# Altium PCB UU121_WiFi.PcbDoc
Units mm, origin at the board's own origin, x right, y up, seen from the top; angles counter-clockwise.
Board outline 30 x 50.86 mm, 4 copper layers (Top Layer, PWR, GND, Bottom Layer), stack 1.449 mm thick; 28 components, 15 nets, 153 pads, 33 vias.
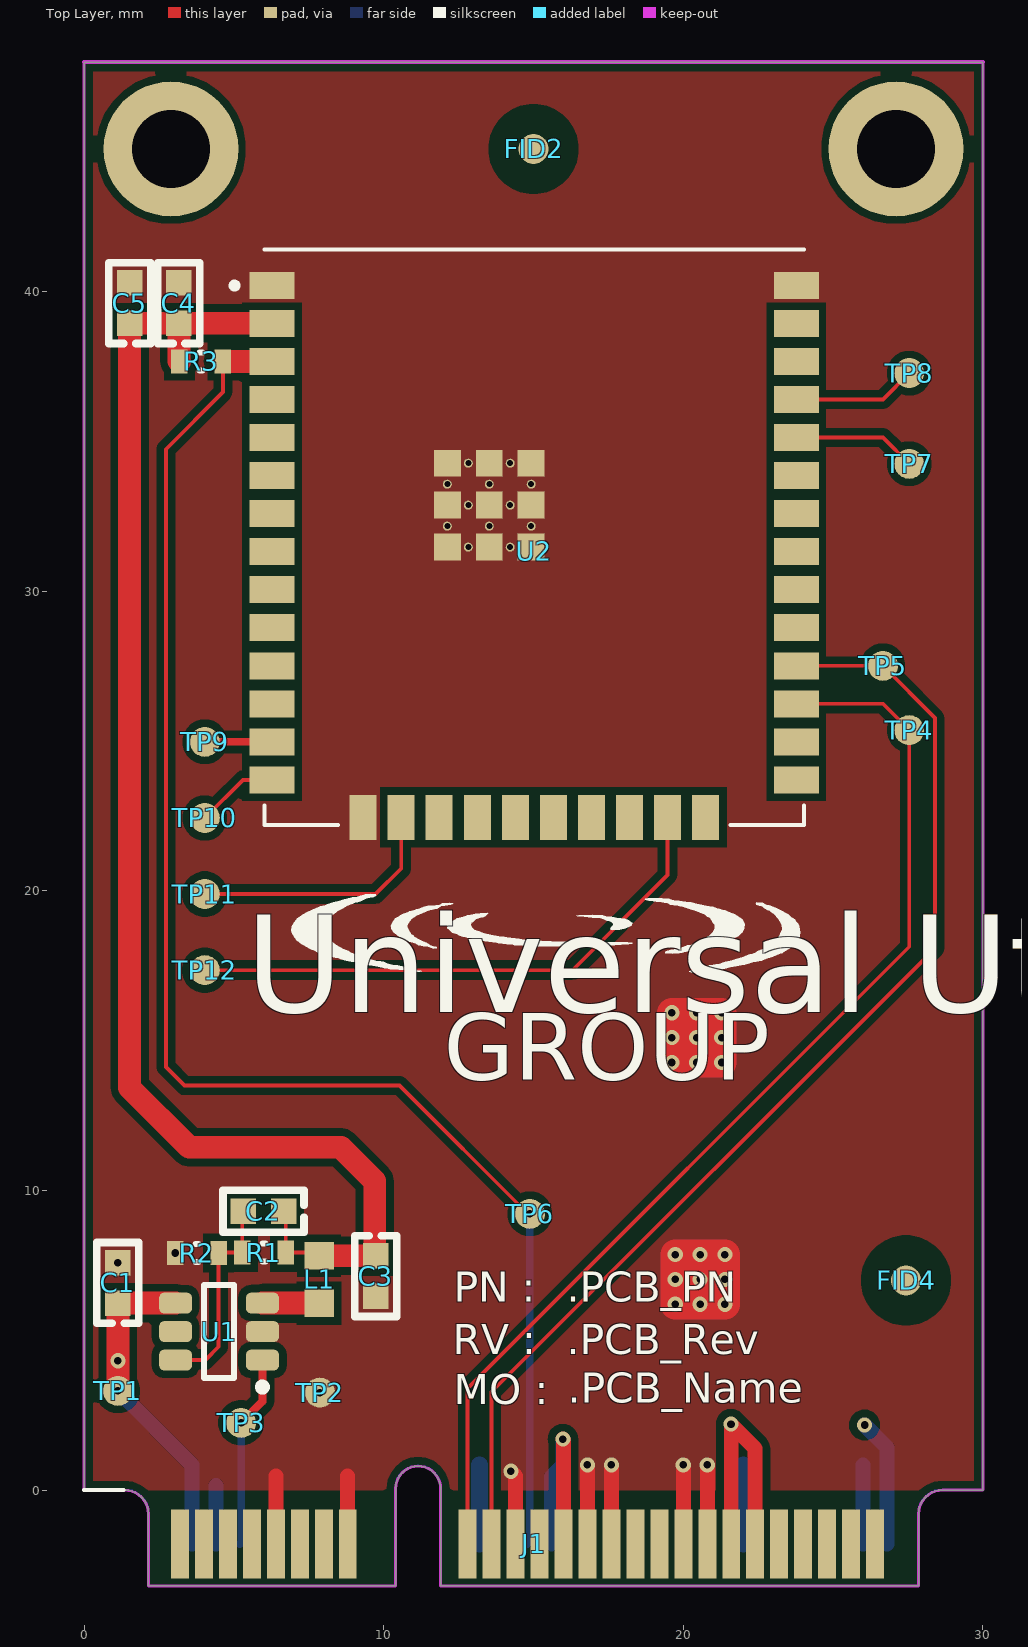
[diagram p0: Top Layer view]
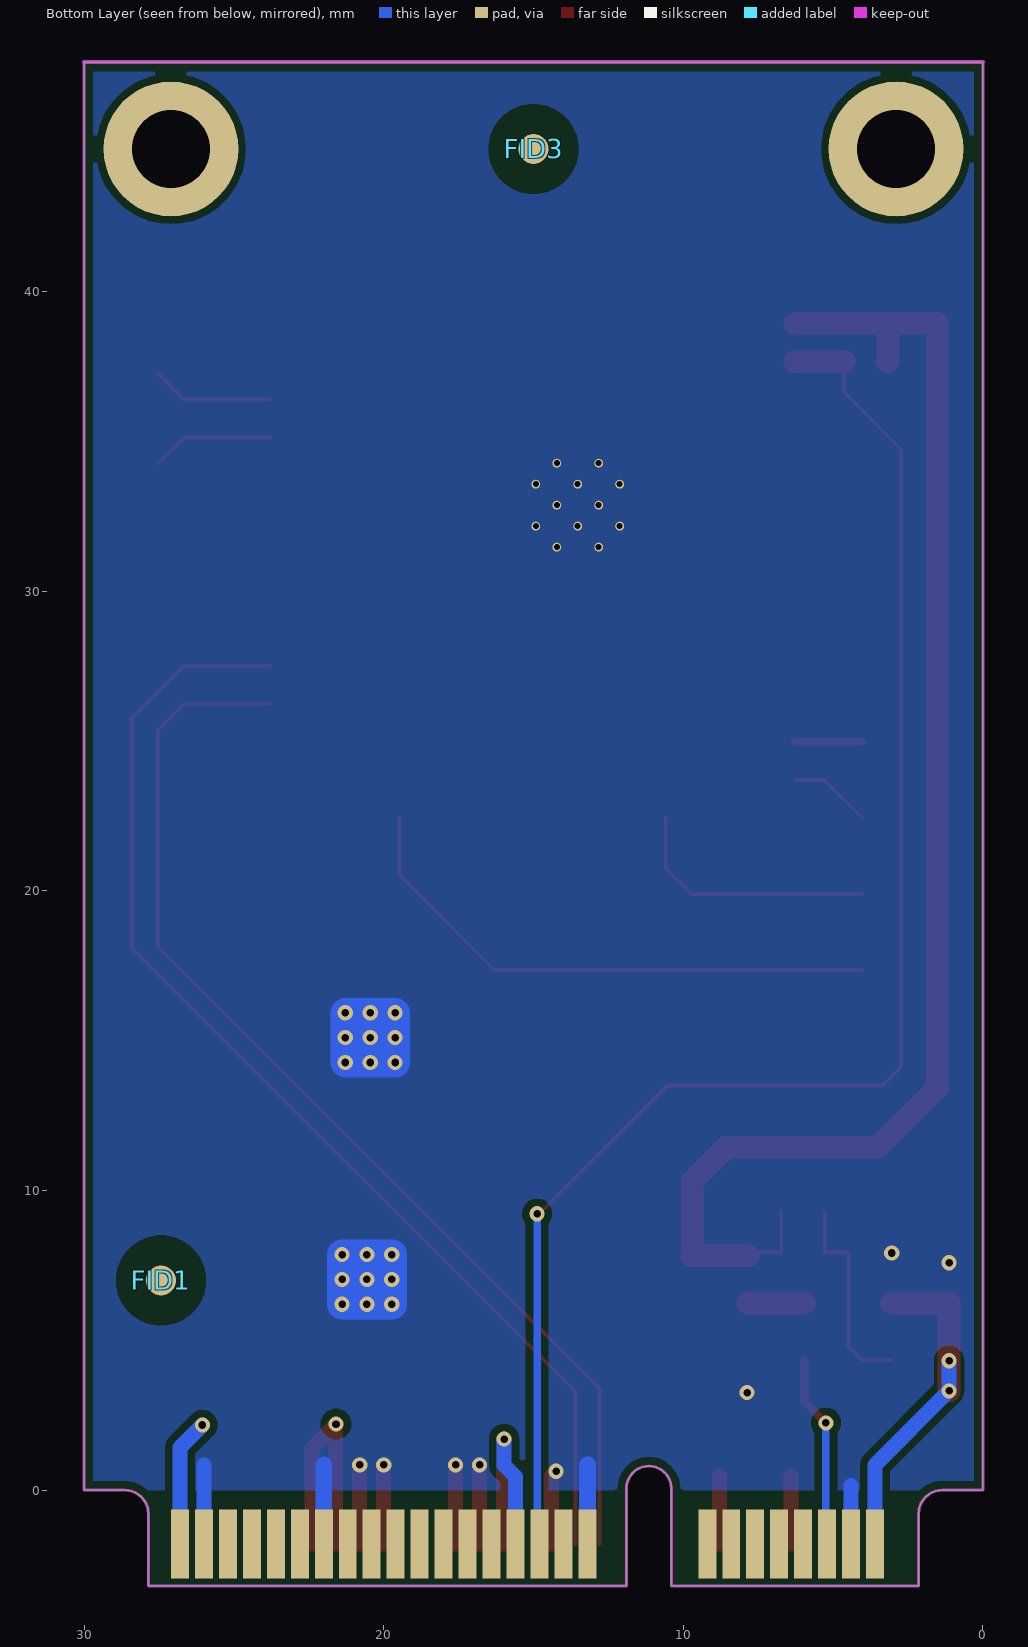
[diagram p1: Bottom Layer view, seen from below]
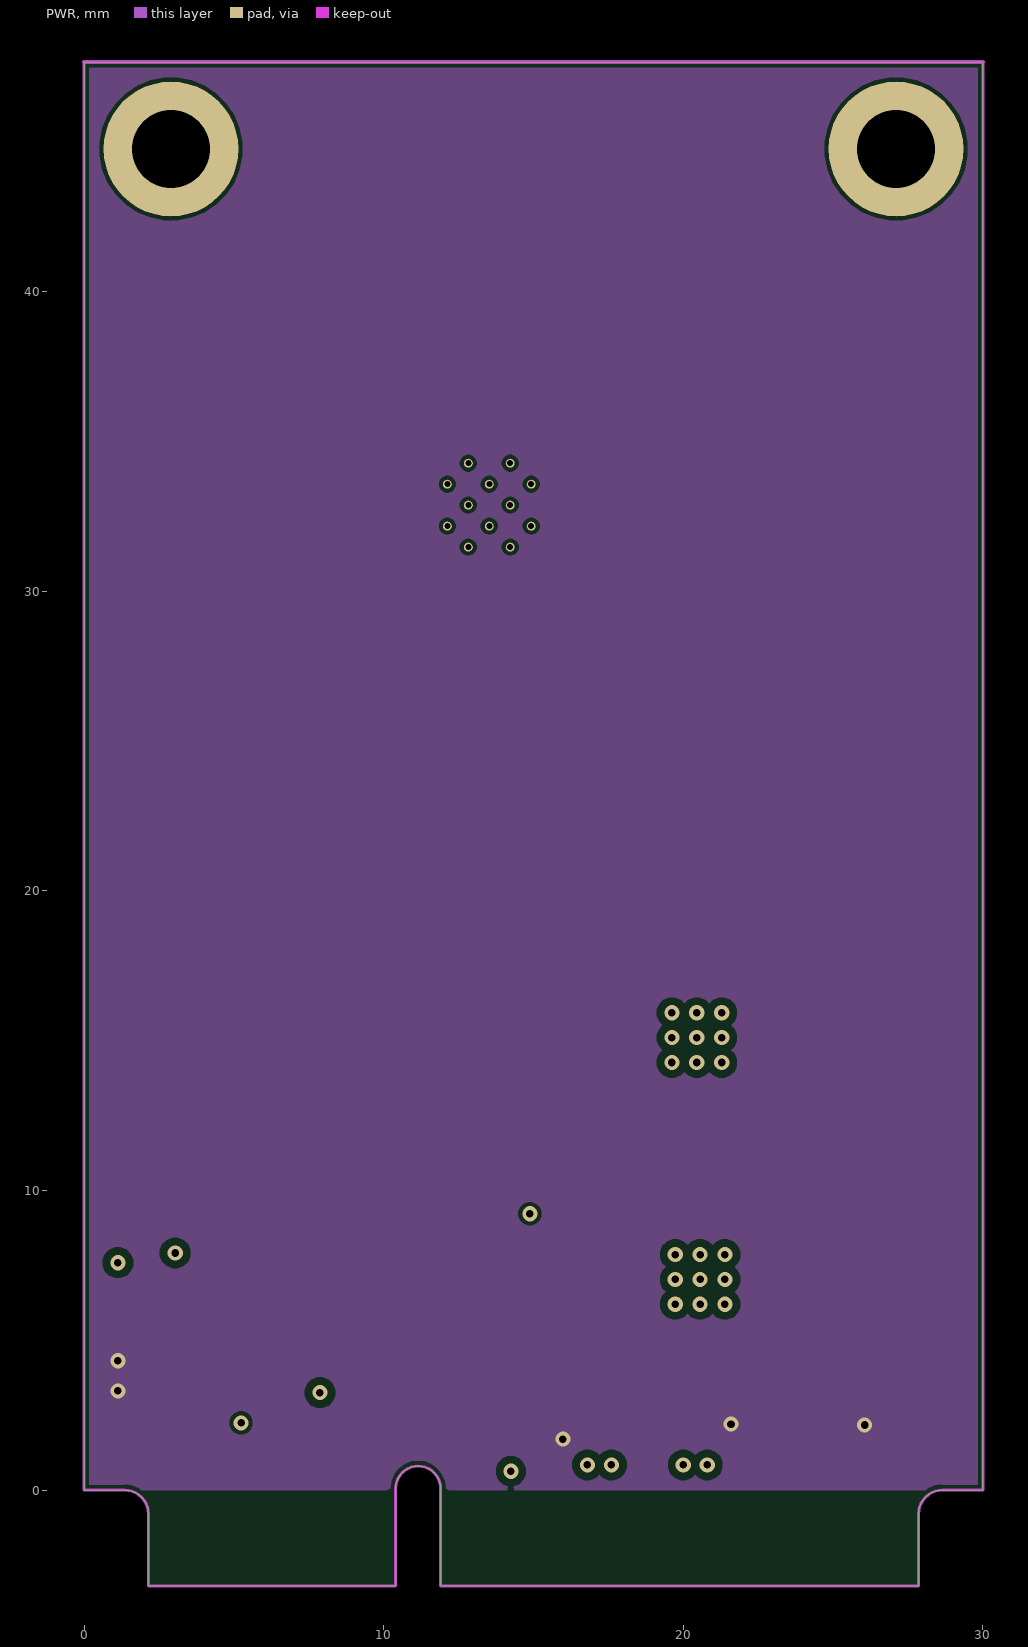
[diagram p2: PWR]
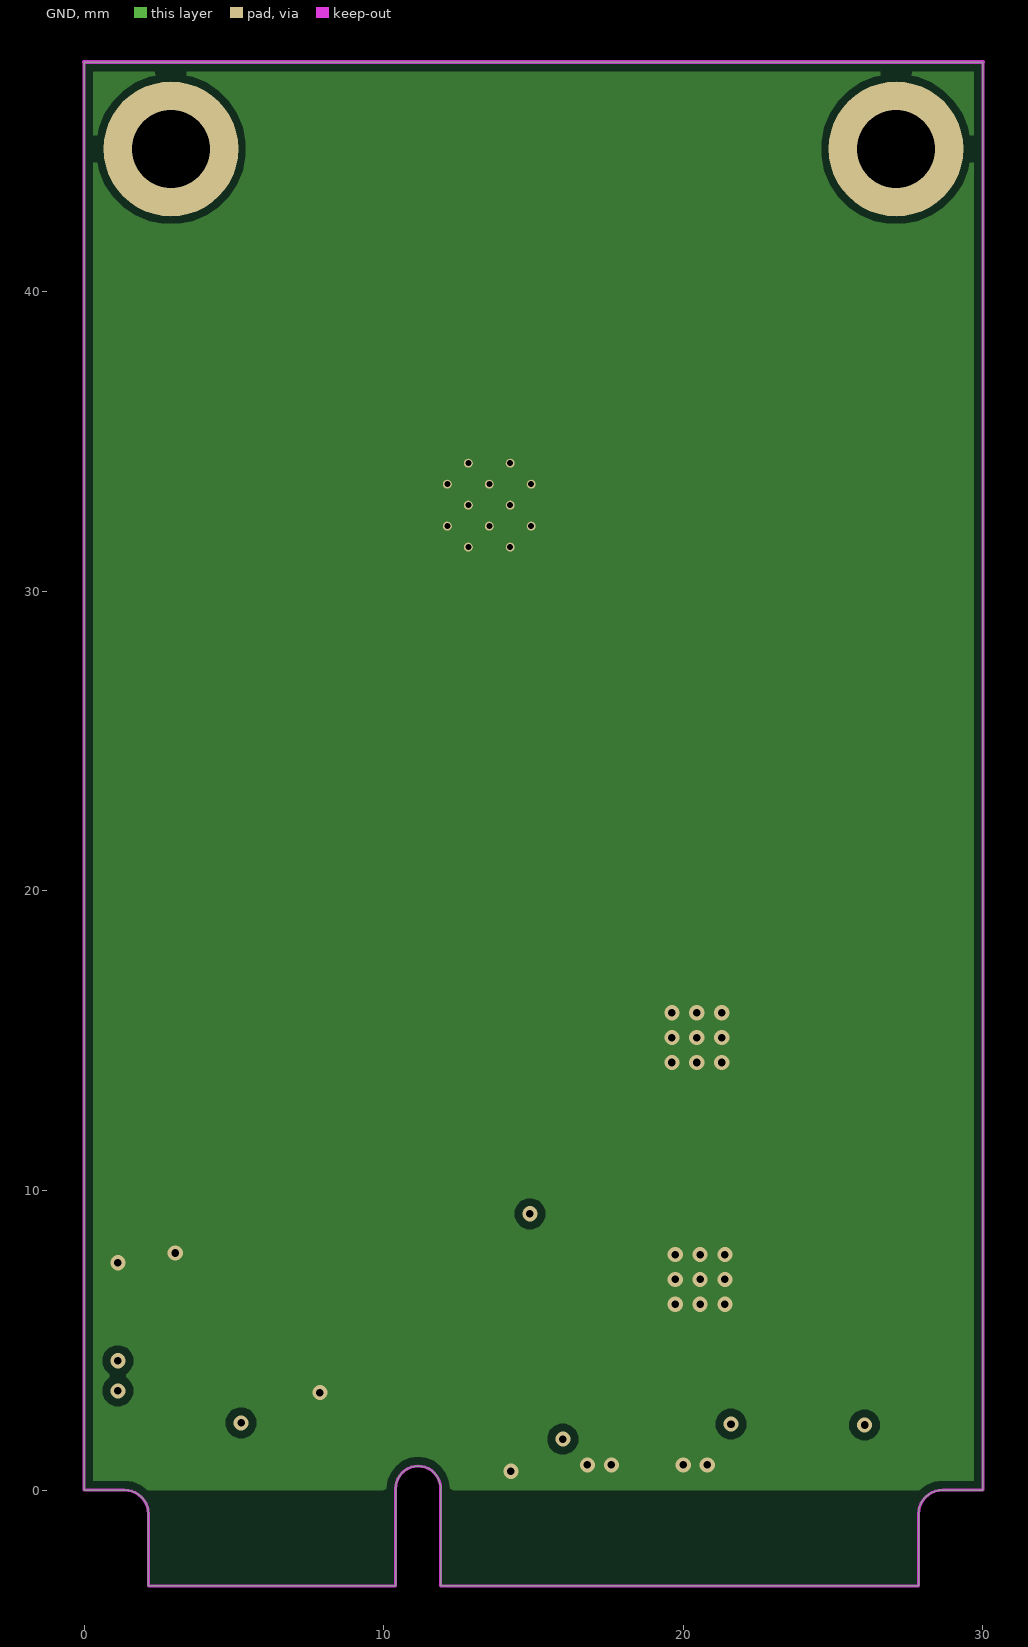
[diagram p3: GND]
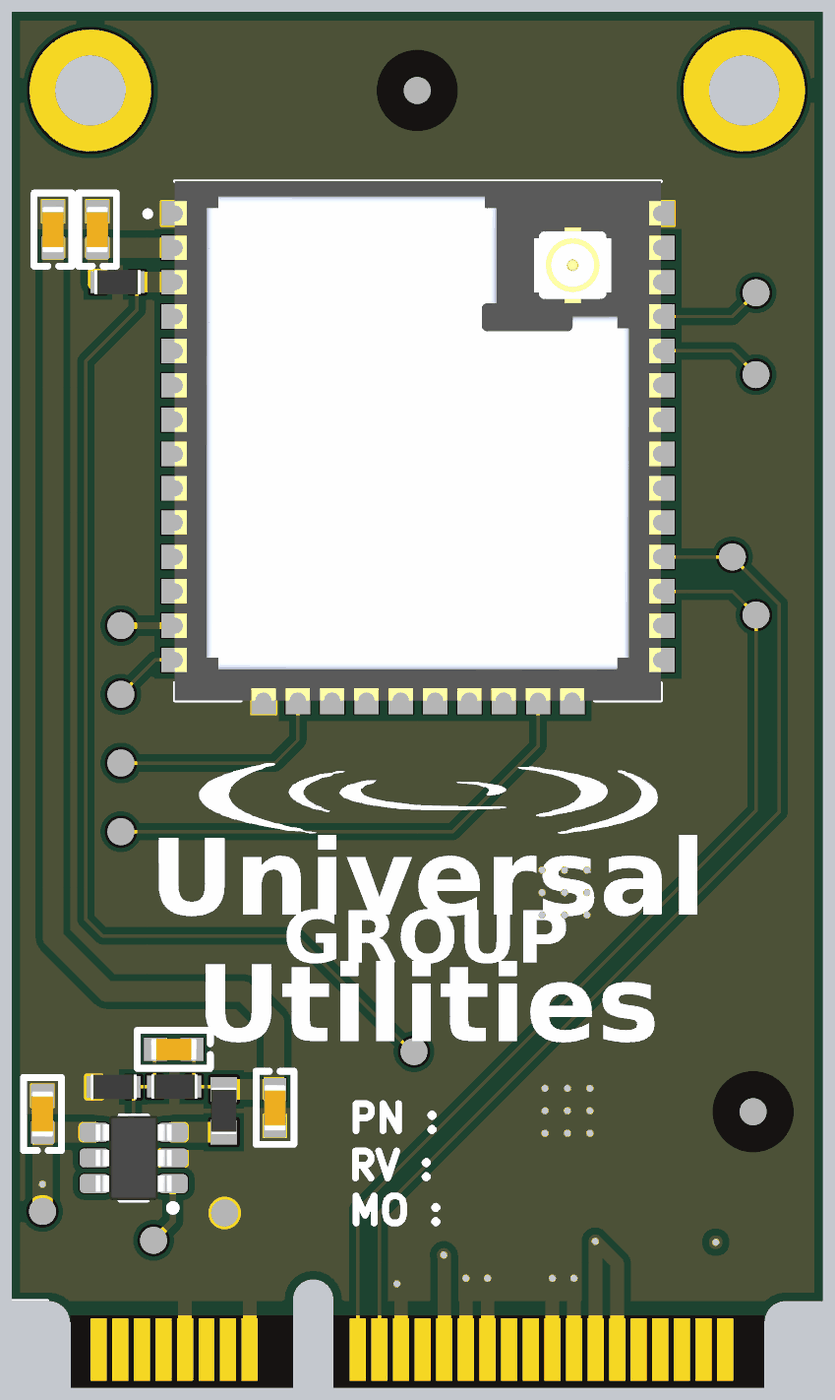
[diagram p4: 3D render of the assembled board from above, using the file's embedded part models]

## Layer stack, top to bottom
Top Solder: solder mask 0.0254, Solder Resist, Dk 3.5
Top Layer: signal copper 0.0356
Dielectric 1: prepreg 0.0711, PP-006, Dk 4.1
PWR: signal copper 0.0178
Core: core 1.2, FR-4, Dk 3.95
GND: signal copper 0.0178
Dielectric 2: prepreg 0.0711, PP-006, Dk 4.1
Bottom Layer: signal copper 0.0356
Bottom Solder: solder mask 0.0254, Solder Resist, Dk 3.5

## Board outline
2.15,-3.2 2.15,-0.8 ccw(c1.35,-0.8) 1.35,0 0,0 0,47.66 30,47.66 30,0 28.65,0 ccw(c28.65,-0.8) 27.85,-0.8 27.85,-3.2 11.9,-3.2 11.9,0.05 ccw(c11.15,0.05) 11.15,0.8 ccw(c11.15,0.05) 10.4,0.05 10.4,-3.2

## Design rules (kind name [scope] priority, off if disabled: settings)
Clearance Clearance_FID [HasPad('FID*')] p1: gap=1 ignorepadtopadclearanceinfootprint=FALSE except(0: Arc-Hole Track-Hole SMDPad-Hole THPad-Hole Via-Hole Fill-Hole Poly-Hole Region-Hole Text-Hole)
Clearance Clearance_USB [HasPad('J1*')] p2: gap=0.1 ignorepadtopadclearanceinfootprint=FALSE except(0: Arc-Hole Track-Hole SMDPad-Hole THPad-Hole Via-Hole Fill-Hole Poly-Hole Region-Hole Text-Hole)
Clearance Clearance_Polygon [InNamedPolygon('DGND')] p3: gap=0.254 ignorepadtopadclearanceinfootprint=FALSE
Clearance Clearance_IC [HasPad('C*') or  HasPad('U*') or HasPad('J*')] p4: gap=0.127 ignorepadtopadclearanceinfootprint=FALSE except(0: Arc-Hole Track-Hole SMDPad-Hole THPad-Hole Via-Hole Fill-Hole Poly-Hole Region-Hole Text-Hole)
Clearance Clearance_GND [InNet('DGND')] p5: gap=0.254 ignorepadtopadclearanceinfootprint=FALSE except(0: Arc-Hole Track-Hole SMDPad-Hole THPad-Hole Via-Hole Fill-Hole Poly-Hole Region-Hole Text-Hole)
Clearance [All] p6: gap=0.127 ignorepadtopadclearanceinfootprint=FALSE except(0: Arc-Hole Track-Hole SMDPad-Hole THPad-Hole Via-Hole Fill-Hole Poly-Hole Region-Hole Text-Hole)
DiffPairsRouting DiffPairsRouting_1 [All] p2: maxlimit=0.254 minlimit=0.254 mostfreqgap=0.254 toplayer_minwidth=0.381 toplayer_maxwidth=0.381 toplayer_prefwidth=0.381 midlayer1_minwidth=0.381 midlayer1_maxwidth=0.381 midlayer1_prefwidth=0.381 midlayer2_minwidth=0.381 midlayer2_maxwidth=0.381 midlayer2_prefwidth=0.381 bottomlayer_minwidth=0.381 bottomlayer_maxwidth=0.381 bottomlayer_prefwidth=0.381 maxuncoupledlength=12.7
FanoutControl Fanout_LCC [IsLCC] p1: bgadir=Out bgaviamode=Centered fanoutstyle=Auto fanoutdirection=Alternating viagrid=0.025 // Fanout_LCC (Default Rule)
FanoutControl Fanout_SOIC [IsSOIC] p2: bgadir=Out bgaviamode=Centered fanoutstyle=Auto fanoutdirection=Alternating viagrid=0.025 // Fanout_SOIC (Default Rule)
FanoutControl Fanout_BGA [IsBGA] p3: bgadir=Out bgaviamode=Centered fanoutstyle=Auto fanoutdirection=Alternating viagrid=0.025 // Fanout_BGA (Default Rule)
FanoutControl Fanout_Default [All] p4: bgadir=Out bgaviamode=Centered fanoutstyle=Auto fanoutdirection=Alternating viagrid=0.025 // Fanout_Default (Default Rule)
FanoutControl Fanout_Small [(CompPinCount < 5)] p5: bgadir=Out bgaviamode=Centered fanoutstyle=Auto fanoutdirection=OutThenIn viagrid=0.025 // Fanout_Small (Default Rule)
HoleToHoleClearance [All] p1: gap=0.25 allowstackedmicrovias=TRUE
MinimumAnnularRing [All] p1: minimumring=0.05
MinimumSolderMaskSliver [All] p1: minsoldermaskwidth=0.05
PasteMaskExpansion PasteMaskExpansion_1 [All] p2: expansion=0
PolygonConnect [All] p1: connectstyle=Direct reliefconductorwidth=0.254 reliefentries=4 polygonreliefangle="90 Angle" airgapwidth=0.254
RoutingVias [All] p1: holewidth=0.711 width=1.27 viastyle="Through Hole" minholewidth=0.15 minwidth=0.3 maxholewidth=0.711 maxwidth=1.27
SilkToBoardRegionClearance SilkToBoardRegionClearance_3 [All] p2:
SilkToBoardRegionClearance SilkToBoardRegionClearance_2 [All] p3:
SilkToBoardRegionClearance SilkToBoardRegionClearance_1 [All] p4:
SilkToSolderMaskClearance [IsPad] p1: minsilkscreentomaskgap=0.12 clearancetoexposedcopper=TRUE
SolderMaskExpansion [All] p1: expansion=0.102 istentingtop=FALSE
SolderMaskExpansion SolderMaskExpansion_1 [All] p2: expansion=0.102 istentingtop=FALSE
Width Width_BGA [All] p1: maxlimit=5.56 minlimit=0.127 preferedwidth=0.254
Width [All] p2: maxlimit=5.56 minlimit=0.127 preferedwidth=0.254
22 further rules are at their usual default settings.

## Components (designator, comment, footprint, x,y, rotation, side; value= is the part's Value field where it differs from the comment)
C1 "22uF" C_0603 1.129,6.913 r90 top
C2 "47pF" C_0603 5.988,9.3 r180 top
C3 "22uF" C_0603 9.733,7.143 r270 top
C4 "22uF" C_0603 3.16,39.616 r90 top
C5 "0.1uF" C_0603 1.519,39.616 r90 top
FID1 "FIDUCIAL" FID 27.433,6.997 r180 bottom value="Non SE"
FID2 "FIDUCIAL" FID 15,44.76 r90 top value="Non SE"
FID3 "FIDUCIAL" FID 15,44.76 r90 bottom value="Non SE"
FID4 "FIDUCIAL" FID 27.433,6.997 r90 top value="Non SE"
J1 "2041119-1" PCIEMINI-GF-2D-800-1K-S52 0,0 r0 top locked
L1 "1.5uH" L_0603 7.843,7.028 r90 top
R1 "49.9K" R_0603 6.005,7.923 r180 top
R2 "11K" R_0603 3.765,7.911 r180 top
R3 "150k" R_0603 3.908,37.671 r0 top
TP1 "" TP_Testpoint 1.129,3.31 r90 top
TP2 "" TP_Testpoint 7.871,3.252 r90 top
TP3 "" TP_Testpoint 5.24,2.241 r90 top
TP4 "" TP_Testpoint 27.54,25.362 r180 top
TP5 "" TP_Testpoint 26.661,27.511 r180 top
TP6 "" TP_Testpoint 14.88,9.22 r90 top
TP7 "" TP_Testpoint 27.54,34.252 r90 top
TP8 "" TP_Testpoint 27.54,37.279 r90 top
TP9 "" TP_Testpoint 4.03,24.971 r90 top
TP10 "" TP_Testpoint 4.03,22.431 r90 top
TP11 "" TP_Testpoint 4.03,19.891 r90 top
TP12 "" TP_Testpoint 4.03,17.351 r90 top
U1 "JW5222" SOT95P270X115-6M 4.503,5.288 r180 top
U2 "ESP32-WROOM-32UE (8MB)" MODULE_ESP32-WROOM-32UE 15.024,31.801 r0 top

## Footprints (in the part's own frame and the unit in brackets; to place one, negate y for a bottom-side part, rotate by r counter-clockwise, add the part's x,y. Pads: shape width x height; smd on the part's side, far side on the other; paste and mask are expansions set on the pad)
C_0603 [mm] "Chip Capacitor, 2-Leads, Body 1.60x0.75mm, IPC Medium Density"
  rect 0.85x0.85 smd mask+0.03: 1(-0.675,0) 2(0.675,0)
  silkscreen extent -1.35,-0.7 1.35,0.7, body extent -0.85,-0.4 0.85,0.4, height 0.8
FID [mm]
  round 1 smd mask+1: ""(0,0)
L_0603 [mm] "Chip Inductor, 2-Leads, Body 1.60x0.80mm, IPC Medium Density"
  rect 0.92x0.98 smd: 1(-0.79,0) 2(0.79,0)
  body extent -0.87,-0.48 0.87,0.48, height 0.8
MODULE_ESP32-WROOM-32UE [mm] "(M113EH6400UH3Q0)"
  rect 1.5x0.9 smd mask+0.05: 1(-8.75,8.41) 2(-8.75,7.14) 3(-8.75,5.87) 4(-8.75,4.6) 5(-8.75,3.33) 6(-8.75,2.06) 7(-8.75,0.79) 8(-8.75,-0.48) 9(-8.75,-1.75) 10(-8.75,-3.02) 11(-8.75,-4.29) 12(-8.75,-5.56) 13(-8.75,-6.83) 14(-8.75,-8.1) 25(8.75,-8.1) 26(8.75,-6.83) 27(8.75,-5.56) 28(8.75,-4.29) 29(8.75,-3.02) 30(8.75,-1.75) 31(8.75,-0.48) 32(8.75,0.79) 33(8.75,2.06) 34(8.75,3.33) 35(8.75,4.6) 36(8.75,5.87) 37(8.75,7.14) 38(8.75,8.41)
  rect 0.9x1.5 smd mask+0.05: 15(-5.71,-9.35) 16(-4.44,-9.35) 17(-3.17,-9.35) 18(-1.9,-9.35) 19(-0.63,-9.35) 20(0.64,-9.35) 21(1.91,-9.35) 22(3.18,-9.35) 23(4.45,-9.35) 24(5.72,-9.35)
  rect 0.9x0.9 smd mask+0.05: 38(-2.9,-0.33) 38(-2.9,1.07) 38(-2.9,2.47) 38(-1.5,-0.33) 38(-1.5,1.07) 38(-1.5,2.47) 38(-0.1,-0.33) 38(-0.1,1.07) 38(-0.1,2.47)
  round 0.3 hole 0.2 mask+0.05: 38(-2.9,0.37) 38(-2.9,1.77) 38(-2.2,-0.33) 38(-2.2,1.07) 38(-2.2,2.47) 38(-1.5,0.37) 38(-1.5,1.77) 38(-0.8,-0.33) 38(-0.8,1.07) 38(-0.8,2.47) 38(-0.1,0.37) 38(-0.1,1.77)
  silkscreen extent -10.1,-9.6 9,9.6, body extent -9,-9.6 9,9.6, height 3.35
PCIEMINI-GF-2D-800-1K-S52 [mm]
  rect 0.6x2.3 smd paste-0.9: 1(3.2,-1.8) 3(4,-1.8) 5(4.8,-1.8) 7(5.6,-1.8) 9(6.4,-1.8) 11(7.2,-1.8) 13(8,-1.8) 15(8.8,-1.8) 17(12.8,-1.8) 19(13.6,-1.8) 21(14.4,-1.8) 23(15.2,-1.8) 25(16,-1.8) 27(16.8,-1.8) 29(17.6,-1.8) 31(18.4,-1.8) 33(19.2,-1.8) 35(20,-1.8) 37(20.8,-1.8) 39(21.6,-1.8) 41(22.4,-1.8) 43(23.2,-1.8) 45(24,-1.8) 47(24.8,-1.8) 49(25.6,-1.8) 51(26.4,-1.8)
  rect 0.6x2.3 smd far side paste-0.9: 2(3.6,-1.8) 4(4.4,-1.8) 6(5.2,-1.8) 8(6,-1.8) 10(6.8,-1.8) 12(7.6,-1.8) 14(8.4,-1.8) 16(9.2,-1.8) 18(13.2,-1.8) 20(14,-1.8) 22(14.8,-1.8) 24(15.6,-1.8) 26(16.4,-1.8) 28(17.2,-1.8) 30(18,-1.8) 32(18.8,-1.8) 34(19.6,-1.8) 36(20.4,-1.8) 38(21.2,-1.8) 40(22,-1.8) 42(22.8,-1.8) 44(23.6,-1.8) 46(24.4,-1.8) 48(25.2,-1.8) 50(26,-1.8) 52(26.8,-1.8)
  Keep-Out Layer lines w0.1: 0,0 1.35,0 cw(c1.35,-0.8) 2.15,-0.8 2.15,-3.2 10.4,-3.2 10.4,0.05 cw(c11.15,0.05) 11.15,0.8 cw(c11.15,0.05) 11.9,0.05 11.9,-3.2 27.85,-3.2 27.85,-0.8 cw(c28.65,-0.8) 28.65,0 30,0
  silkscreen extent 0,0 1.32,0
R_0603 [mm] "Chip Resistor, 2-Leads, Body 1.60x0.80mm, IPC High Density"
  rect 0.55x0.8 smd: 1(-0.725,0) 2(0.725,0)
  silkscreen extent -0.05,-0.3 0.05,0.3, body extent -0.85,-0.45 0.85,0.45, height 0.45
SOT95P270X115-6M [mm] "SOT23, 6-Leads, Body 2.92x2.70mm, Pitch 0.95mm, IPC Low Density"
  rrect50% 1.1x0.7 smd mask+0.05: 1(-1.45,0.95) 2(-1.45,0) 3(-1.45,-0.95) 4(1.45,-0.95) 5(1.45,0) 6(1.45,0.95)
  silkscreen extent -1.58,-1.55 0.5,1.97, body extent -1.4,-1.56 1.4,1.56, height 1.15
TP_Testpoint [mm] "Size 1 mm"
  round 1 smd: 1(0,0)

## Part data
C1 C3 C4: library part C_Capacitor, "CAP CER 22UF 10V X5R 0603", Manufacturer="TDK Corporation", PartNumber=C1608X5R1A226M080AC, Value2=10V, PackageReference=0603, PartID=445-9077-1-ND
C2: library part C_Capacitor, "CAP CER 47PF 50V X7R 0603", Manufacturer=KEMET, PartNumber=C0603C470J5RAC7867, Value2=50V, PackageReference=0603, PartID=399-C0603C470J5RAC7867CT-ND
C5: library part C_Capacitor, "CAP CER 0.1UF 50V X7R 0603", Manufacturer=KEMET, PartNumber=C0603C104K5RACTU, Value2=50V, PackageReference=0603, PartID=399-5089-1-ND
FID1 FID2 FID3 FID4: library part FID_FIDUCIAL, "Fiducial", Manufacturer=mindek30@gmail.com, PartNumber=UU121_A0, Value2="Non SE", PackageReference="Non SE", PartID=A0, Value3="Non SE"
J1: library part CON_PCI-E-52P, "CONN PCI EXP MINI FEMALE 52POS", Manufacturer="TE Connectivity AMP Connectors", PartID=A108265CT-ND, PartNumber=2041119-1
L1: library part L_Inductor, "10µH Shielded Multilayer Inductor 250mA 1.05Ohm 0603 (1608 Metric)", Manufacturer="Taiyo Yuden", PartNumber=MBKK1608T1R5M, Value2=1Mhz, PackageReference=0603, PartID=587-4149-1-ND
R1: library part R_Resister, "RES 120K OHM 5% 1/10W 0603", Manufacturer="Vishay Dale", PartNumber=CRCW060349K9FKEAC, Value2=0.1W, PackageReference=0603, PartID=541-3989-1-ND
R2: library part R_Resister, "RES 11K OHM 1% 1/10W 0603", Manufacturer="Vishay Dale", PartNumber=CRCW060311K0FKEAC, Value2=0.1W, PackageReference=0603, PartID=541-5146-1-ND
R3: library part R_Resister, "RES SMD 150K OHM 1% 1/10W 0603", Manufacturer="Vishay Dale", PartNumber=CRCW0603150KFKEAC, Value2=0.1W, PackageReference=0603, PartID=541-4034-1-ND
TP1 TP2 TP3 TP4 TP5 TP6 TP7 TP8 TP9 TP10 TP11 TP12: library part TP_TestPoint, "TestPoint"
  TP1 TP2 TP3 TP4 TP5 TP6: Revision="July-2002: Re-released for DXP Platform."
U1: library part IC_PMS_JW5222, "DC DC CONVERTER 5V 5W", Manufacturer="JoulWatt Tech", PackageReference=SOT-23-5, PartID=C371424, PartNumber=JW5222
U2: library part IC_MCU_ESP32-WROOM-32UE, "RX TXRX MODULE WIFI U.FL SMD", Manufacturer="Espressif Systems", PackageReference=38-SMD, PartID=1965-ESP32-WROOM-32UE(8MB)CT-ND, PartNumber="ESP32-WROOM-32UE (8MB)"

## Free pads (board coordinates)
  round 4.5 hole 2.6: 0(2.9,44.76) 0(27.1,44.76)

## Via types
v1: diameter 0.508, hole 0.254, Top Layer to Bottom Layer, tented top, 33 vias

## Nets (pads, with @x,y where several pads share a name; then routed paths per layer and width w, separated by ;. In a path a pad name is that pad's centre, name@x,y a point inside that pad or via, vN(x,y) a via of type N, cw(c..) or ccw(c..) an arc to the next point about the centre after c; other vN are vias at no path point)
+3.3V: C2.1 C3.1 C4.1 C5.1 L1.2 R1.1 R3.1 U2.2 | length 47.9
  Top Layer w0.127: C2.1@6.73,9.3 R1.1 7.738,7.923 L1.2
  Top Layer w0.762: R3.1 3.172,37.682 3.172,38.929 C4.1 ; U2.2 C4.1 ; L1.2 C3.1 9.7,7.851 9.7,10.31 8.57,11.44 3.51,11.44 1.519,13.431 C5.1 C4.1
+VCC: C1.1 J1.2 J1.24 J1.25 J1.39 J1.41 J1.52 TP1.1 U1.4 | length 31.7
  Top Layer w0.5: v1(15.98,1.7) 15.98,1.698 16,1.678 J1.25 ; J1.39 21.6,2.19 22.4,1.39 J1.41
  Top Layer w0.762: v1(1.129,3.31) v1(1.129,4.313) C1.1 U1.4
  Bottom Layer w0.5: v1(1.129,4.313) v1(1.129,3.31) 3.6,0.839 J1.2 ; J1.24 15.6,0.446 15.978,0.824 15.978,1.698 v1(15.98,1.7) ; v1(26.05,2.17) 26.8,1.42 J1.52
  other v1: 21.59,2.202
DGND: C1.2 C3.2 C4.2 C5.2 J1.4 J1.9 J1.15 J1.18 J1.21 J1.27 J1.29 J1.35 J1.37 J1.40 J1.50 R2.2 TP2.1 U1.2 U2.1 U2.15 U2.38 | length 64
  Top Layer w0.5: J1.9 6.4,0.473 ; J1.15 8.8,0.473 ; v1(14.245,0.63) 14.245,0.628 14.4,0.473 J1.21 ; J1.27 v1(16.8,0.839) ; J1.29 v1(17.6,0.839) ; J1.35 v1(20,0.839) ; J1.37 v1(20.8,0.839)
  Top Layer w1: v1(19.62,15.1) v1(20.45,15.1) ; v1(19.62,15.1) v1(19.62,15.93) v1(20.45,15.93) ; v1(19.62,15.1) v1(19.62,14.27) v1(20.45,14.27) ; v1(19.73,7.03) v1(20.56,7.03) ; v1(19.73,7.03) v1(19.73,7.86) v1(20.56,7.86) ; v1(19.73,7.03) v1(19.73,6.2) v1(20.56,6.2) ; v1(20.45,14.27) v1(20.45,15.1) ; v1(20.45,14.27) v1(21.28,14.27) v1(21.28,15.1) ; v1(20.45,15.1) v1(20.45,15.93) ; v1(20.45,15.1) v1(21.28,15.1) ; v1(20.45,15.93) v1(21.28,15.93) v1(21.28,15.1) ; v1(20.56,6.2) v1(20.56,7.03) ; v1(20.56,6.2) v1(21.39,6.2) v1(21.39,7.03) ; v1(20.56,7.03) v1(20.56,7.86) ; v1(20.56,7.03) v1(21.39,7.03) ; v1(20.56,7.86) v1(21.39,7.86) v1(21.39,7.03)
  Bottom Layer w0.5: J1.4 4.4,0.15 ; v1@16.798,0.837 v1(16.8,0.839) ; v1@17.598,0.837 v1(17.6,0.839) ; v1@19.998,0.837 v1(20,0.839) ; v1@20.798,0.837 v1(20.8,0.839) ; J1.50 26,0.839
  Bottom Layer w0.556: J1.18 13.2,0.839 ; J1.40 22,0.839
  Bottom Layer w1: v1(20.45,14.27) v1(21.28,14.27) v1(21.28,15.1) v1(21.28,15.93) v1(20.45,15.93) ; v1(20.45,14.27) v1(20.45,15.1) v1(20.45,15.93) ; v1(20.45,14.27) v1(19.62,14.27) v1(19.62,15.1) v1(19.62,15.93) v1(20.45,15.93) ; v1(20.56,6.2) v1(21.39,6.2) v1(21.39,7.03) v1(21.39,7.86) v1(20.56,7.86) ; v1(20.56,6.2) v1(20.56,7.03) v1(20.56,7.86) ; v1(20.56,6.2) v1(19.73,6.2) v1(19.73,7.03) v1(19.73,7.86) v1(20.56,7.86)
  other v1: 7.871,3.252 1.129,7.588 3.04,7.911
NetC2_2: C2.2 R1.2 R2.1 U1.6 | length 6.9
  Top Layer w0.127: U1.6 4.048,4.338 4.49,4.78 R2.1 ; R2.1@4.502,7.923 R1.2 C2.2@5.28,9.3
NetL1_1: L1.1 U1.3 | length 1.9
  Top Layer w0.762: U1.3 L1.1
SYS_JTCK-SWCLK: TP9.1 U2.13 | length 2.2
  Top Layer w0.254: TP9.1 U2.13
SYS_JTDI: TP10.1 U2.14 | length 2.8
  Top Layer w0.127: TP10.1 5.3,23.701 U2.14
SYS_JTDO-SWO: TP12.1 U2.23 | length 18.7
  Top Layer w0.127: TP12.1 16.301,17.351 19.474,20.524 U2.23
SYS_JTMS-SWDIO: TP11.1 U2.16 | length 8.6
  Top Layer w0.127: TP11.1 9.731,19.891 10.584,20.744 U2.16
UART0_RXD: TP7.1 U2.34 | length 4.1
  Top Layer w0.127: U2.34 26.661,35.131 TP7.1
UART0_TXD: TP8.1 U2.35 | length 4.1
  Top Layer w0.127: U2.35 26.661,36.401 TP8.1
UART1_LTE_EN: J1.6 TP3.1 U1.1 | length 6.5
  Top Layer w0.254: v1(5.24,2.241) 5.953,2.955 U1.1
  Bottom Layer w0.254: J1.6 5.24,-1.76 v1(5.24,2.241)
UART1_LTE_Reset: J1.22 R3.2 TP6.1 U2.3 | length 51.3
  Top Layer w0.127: R3.2 4.633,36.643 2.73,34.74 2.73,14.12 3.35,13.5 10.53,13.5 14.81,9.22 v1(14.88,9.22) TP6.1@14.84,9.18
  Top Layer w0.762: R3.2 U2.3
  Bottom Layer w0.254: J1.22 14.88,-1.72 v1(14.88,9.22)
UART1_LTE_RX: J1.19 TP5.1 U2.28 | length 39
  Top Layer w0.127: J1.19 13.6,3.28 28.4,18.08 28.4,25.772 TP5.1 U2.28
UART1_LTE_TX: J1.17 TP4.1 U2.27 | length 37.4
  Top Layer w0.127: J1.17 12.8,3.394 27.54,18.134 TP4.1 26.661,26.241 U2.27
pads on no net: FID1. FID2. FID3. FID4. J1.1 J1.3 J1.5 J1.7 J1.8 J1.10 J1.11 J1.12 J1.13 J1.14 J1.16 J1.20 J1.23 J1.26 J1.28 J1.30 J1.31 J1.32 J1.33 J1.34 J1.36 J1.38 J1.42 J1.43 J1.44 J1.45 J1.46 J1.47 J1.48 J1.49 J1.51 U1.5 U2.4 U2.5 U2.6 U2.7 U2.8 U2.9 U2.10 U2.11 U2.12 U2.17 U2.18 U2.19 U2.20 U2.21 U2.22 U2.24 U2.25 U2.26 U2.29 U2.30 U2.31 U2.32 U2.33 U2.36 U2.37

## Polygon pours and split planes (outlines as drawn)
+VCC on PWR "3V" (solid, pour order 0): 0,0 0,47.66 30,47.66 30,0
DGND on GND "DGND" (solid, pour order 1): 0,0 0,47.66 30,47.66 30,0
DGND on Top Layer "DGND" (solid, pour order 2): 0,-0.01 0,47.65 30,47.65 30,-0.01
DGND on Bottom Layer "DGND" (solid, pour order 3): 0,0 0,47.66 30,47.66 30,0

## Keep-outs
Keep-Out Layer:
  the board outline again, w0.1

## Silkscreen, mask and mechanical layers (free items; w line width, h text height)
Top Overlay:
  drawing of 6 lines, arcs and shapes, not listed
  text "Universal Utilities" at 5.4,14.872 h5.56
  text "GROUP" at 12.005,12.964 h3.8
  text "PN :" at 12.33,6.28 h1
  text ".PCB_PN" at 16.11,6.28 h1
  text "RV :" at 12.31,4.53 h1
  text ".PCB_Rev" at 16.11,4.53 h1
  text ".PCB_Name" at 16.137,2.914 h1
  text "MO :" at 12.33,2.87 h1
Mechanical 1:
  lines w0.127: 27.5,44.76 2.9,44.76 ; 2.9,44.76 2.9,47.66 0,47.66 0,44.76 2.9,44.76 ; 27.1,44.76 27.1,47.66 30,47.66 30,44.76 27.1,44.76